# EAGLE board telemetry-r1 (EAGLE 7.6.0)
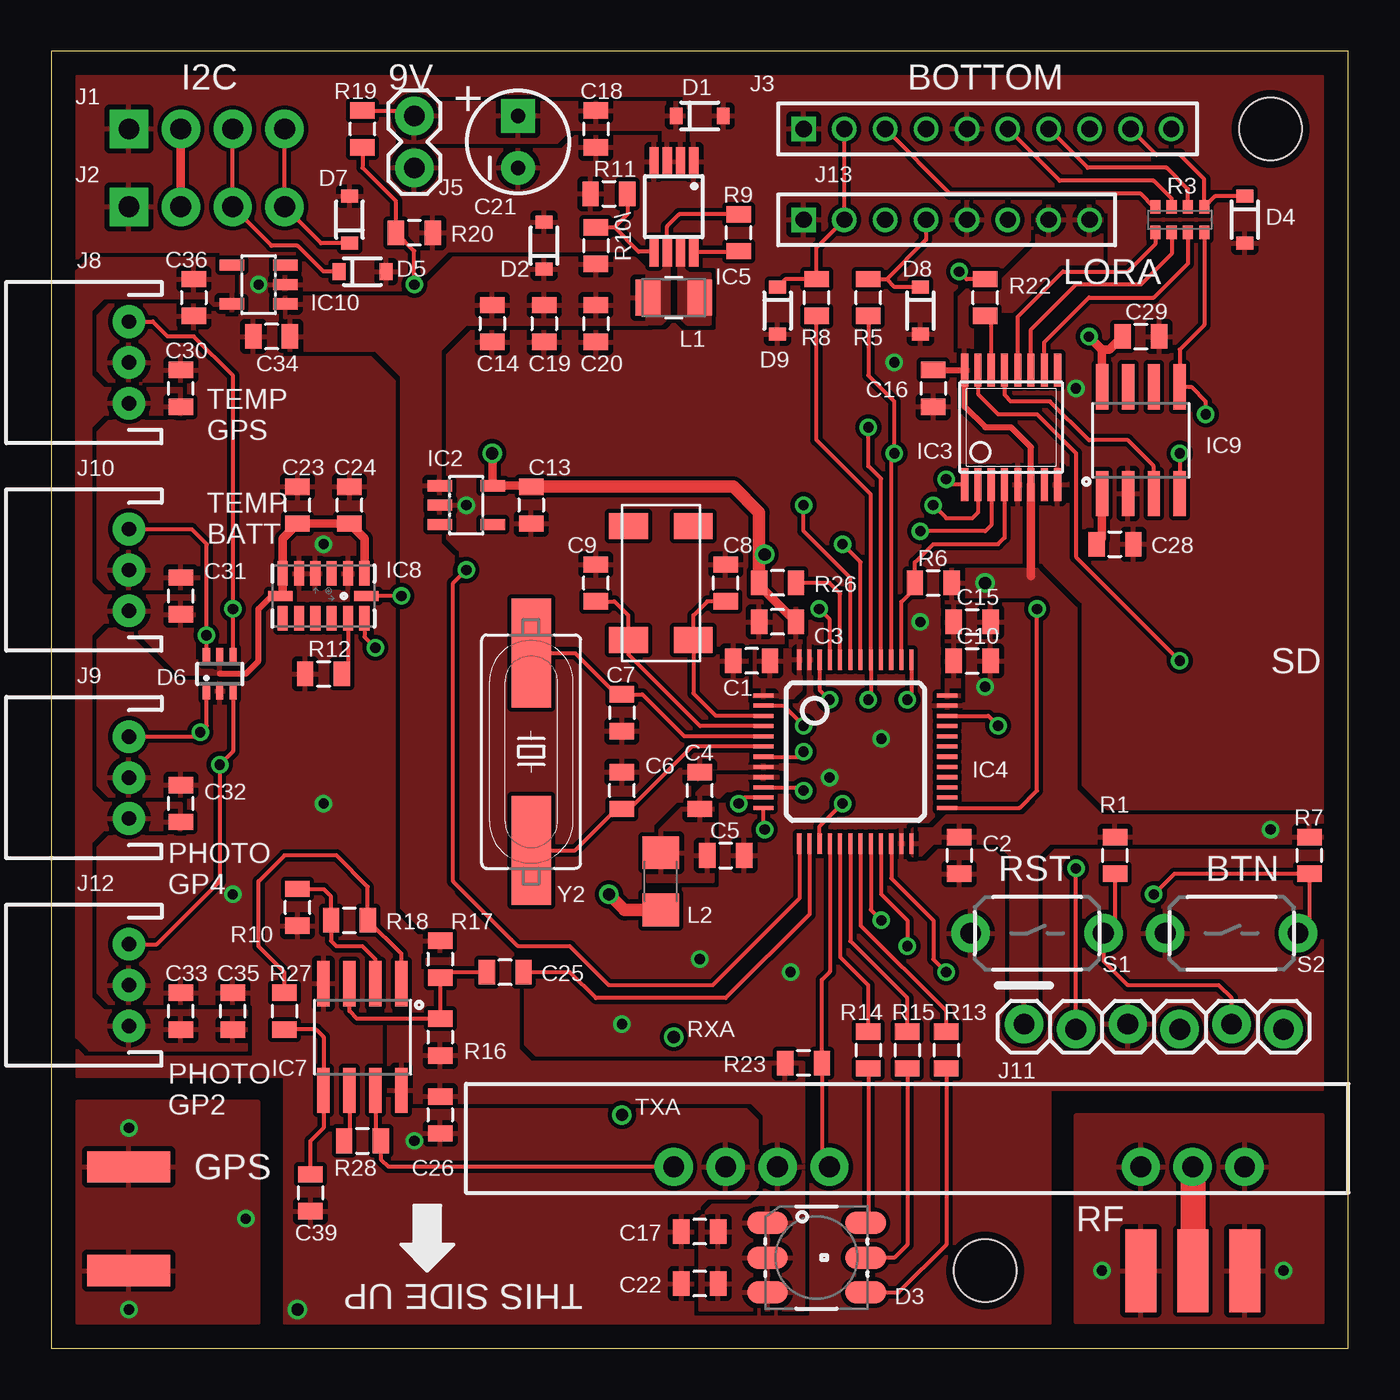
[diagram p0: board, top side]
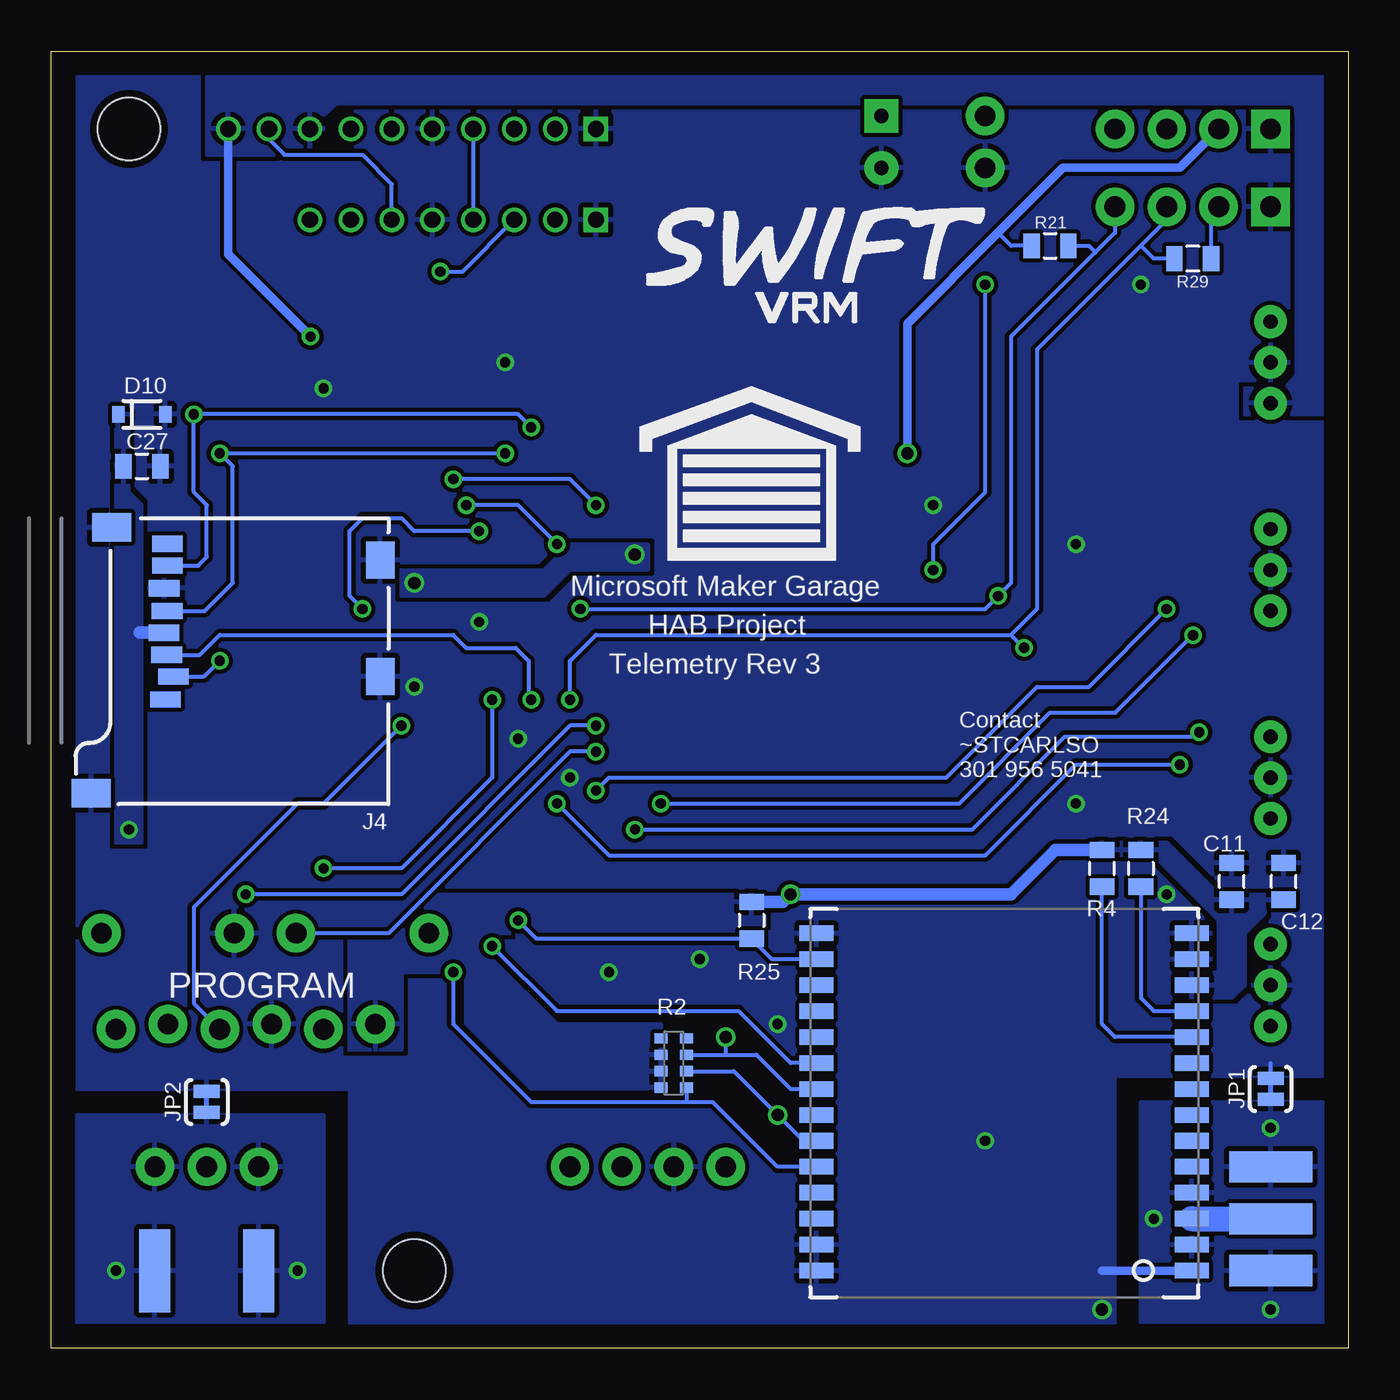
[diagram p1: board, bottom side, seen from below]

Size 63.5 x 63.5 mm. Coordinates in mm from the lower left corner, seen from the top.
Outline: 0,0 63.5,0 63.5,63.5 0,63.5 0,0
Copper layers (1*16): Top 0.0356mm / dielectric 1.5011mm / Bottom 0.0356mm
Design rules "LaenPCBOrder *": minimum track width 6mil, minimum drill 13mil, track to track 8mil, track to pad 8mil, pad to pad 8mil, via to via 8mil, smd to smd 6mil, copper to edge 15mil, drill to drill 6mil, minimum pad ring 7mil, minimum via ring 7mil, stop-mask expansion 3mil, vias tented up to drill 0mil, thermal gap 10mil
Holes 3.05 mm at 45.72,3.81 59.69,59.69

## Footprints (pad centres in the part's own frame; a part is rotated, then mirrored left to right if it is on the bottom)
0805 = smd 0.8 x 1.2: 1 -0.9,0; 2 0.9,0
CPOL-RADIAL-10UF-25V = drill 0.7 pad 1.651 square: 1 1.27,0 | drill 0.7 pad 1.651: 2 -1.27,0
SOD-323 = smd 0.63 x 0.83: A 1.15,0; C -1.15,0
LED-TRICOLOR-5050 = smd 2 x 1.1: 1 -2.4,1.7; 2 -2.4,0; 3 -2.4,-1.7; 4 2.4,-1.7; 5 2.4,0; 6 2.4,1.7
SC70-6L = smd 0.35 x 0.8: 1 -0.65,-0.85; 2 0,-0.85; 3 0.65,-0.85; 4 0.65,0.85; 5 0,0.85; 6 -0.65,0.85
COPERNICUS = smd 0.762 x 1.651: 1 0,-18.364; 2 1.27,-18.364; 3 2.54,-18.364; 4 3.81,-18.364; 5 5.08,-18.364; 6 6.35,-18.364; 7 7.62,-18.364; 8 8.89,-18.364; 9 10.16,-18.364; 10 11.43,-18.364; 11 12.7,-18.364; 12 13.97,-18.364; 13 15.24,-18.364; 14 16.51,-18.364; 15 16.51,0; 16 15.24,0; 17 13.97,0; 18 12.7,0; 19 11.43,0; 20 10.16,0; 21 8.89,0; 22 7.62,0; 23 6.35,0; 24 5.08,0; 25 3.81,0; 26 2.54,0; 27 1.27,0; 28 0,0
SOT23-DBV = smd 0.55 x 1.2: 1 -0.95,-1.3; 2 0,-1.3; 3 0.95,-1.3; 4 0.95,1.3; 5 -0.95,1.3
TSSOP16 = smd 0.35 x 1.6: 1 -2.275,-2.8; 2 -1.625,-2.8; 3 -0.975,-2.8; 4 -0.325,-2.8; 5 0.325,-2.8; 6 0.975,-2.8; 7 1.625,-2.8; 8 2.275,-2.8; 9 2.275,2.8; 10 1.625,2.8; 11 0.975,2.8; 12 0.325,2.8; 13 -0.325,2.8; 14 -0.975,2.8; 15 -1.625,2.8; 16 -2.275,2.8
TQFP48 = smd 0.2 x 1: 1 -2.75,-4.5; 2 -2.25,-4.5; 3 -1.75,-4.5; 4 -1.25,-4.5; 5 -0.75,-4.5; 6 -0.25,-4.5; 7 0.25,-4.5; 8 0.75,-4.5; 9 1.25,-4.5; 10 1.75,-4.5; 11 2.25,-4.5; 12 2.75,-4.5; 25 2.75,4.5; 26 2.25,4.5; 27 1.75,4.5; 28 1.25,4.5; 29 0.75,4.5; 30 0.25,4.5; 31 -0.25,4.5; 32 -0.75,4.5; 33 -1.25,4.5; 34 -1.75,4.5; 35 -2.25,4.5; 36 -2.75,4.5 | smd 1 x 0.2: 13 4.5,-2.75; 14 4.5,-2.25; 15 4.5,-1.75; 16 4.5,-1.25; 17 4.5,-0.75; 18 4.5,-0.25; 19 4.5,0.25; 20 4.5,0.75; 21 4.5,1.25; 22 4.5,1.75; 23 4.5,2.25; 24 4.5,2.75; 37 -4.5,2.75; 38 -4.5,2.25; 39 -4.5,1.75; 40 -4.5,1.25; 41 -4.5,0.75; 42 -4.5,0.25; 43 -4.5,-0.25; 44 -4.5,-0.75; 45 -4.5,-1.25; 46 -4.5,-1.75; 47 -4.5,-2.25; 48 -4.5,-2.75
MSOP8 = smd 0.45 x 1.45: 1 -0.975,-2.2; 2 -0.325,-2.2; 3 0.325,-2.2; 4 0.975,-2.2; 5 0.975,2.2; 6 0.325,2.2; 7 -0.325,2.2; 8 -0.975,2.2
HX1 = drill 1.016 pad 1.88: 1 0,0; 2 2.54,0; 3 5.08,0; 4 20.32,0; 5 22.86,0; 6 25.4,0; 7 27.94,0
SO08 = smd 0.61 x 2.21: 1 -1.905,-2.616; 2 -0.635,-2.616; 3 0.635,-2.616; 4 1.905,-2.616; 5 1.905,2.616; 6 0.635,2.616; 7 -0.635,2.616; 8 -1.905,2.616
LGA14 = smd 0.5 x 1.2: 1 2,1.1; 2 1.2,1.1; 3 0.4,1.1; 4 -0.4,1.1; 5 -1.2,1.1; 6 -2,1.1; 8 -2,-1.1; 9 -1.2,-1.1; 10 -0.4,-1.1; 11 0.4,-1.1; 12 1.2,-1.1; 13 2,-1.1 | smd 1.2 x 0.5: 7 -2.1,0; 14 2.1,0
SOIC8 = smd 0.61 x 2.21: 1 -1.905,-2.616; 2 -0.635,-2.616; 3 0.635,-2.616; 4 1.905,-2.616; 5 1.905,2.616; 6 0.635,2.616; 7 -0.635,2.616; 8 -1.905,2.616
1X04_NO_SILK = drill 1.016 pad 1.88 square: 1 0,0 | drill 1.016 pad 1.88: 2 2.54,0; 3 5.08,0; 4 7.62,0
1X10-2MM = drill 0.8 square: 1 0,0 | drill 0.8: 2 2,0; 3 4,0; 4 6,0; 5 8,0; 6 10,0; 7 12,0; 8 14,0; 9 16,0; 10 18,0
MICROSD_1:1 = smd 0.8 x 1.5: 1 5.096,10.919; 2 6.218,10.519; 3 7.274,10.853; 4 8.367,10.982; 5 9.421,10.828; 6 10.539,10.973; 7 11.648,10.819; 8 12.721,10.819 | smd 1.8 x 1.4: CD1 11.92,0.4; CD2 6.22,0.4 | smd 1.4 x 1.9: GND1 0.497,14.55; GND3 13.52,13.55
1X02 = drill 1.016 pad 1.88: 1 0,0; 2 2.54,0
SMA-EDGE = smd 1.524 x 4.064: GND@0 0,0; GND@1 5.08,0; SIG 2.54,0 | smd 1.524 x 4.064 bottom: GND@2 0,0; GND@3 5.08,0
JST-3-PTH = drill 0.7 pad 1.6: 1 -2,0; 2 0,0; 3 2,0
1X06_LOCK = drill 1.016 pad 1.88: 1 0,0; 2 2.54,-0.254; 3 5.08,0; 4 7.62,-0.254; 5 10.16,0; 6 12.7,-0.254
1X08-2MM = drill 0.8 square: 1 0,0 | drill 0.8: 2 2,0; 3 4,0; 4 6,0; 5 8,0; 6 10,0; 7 12,0; 8 14,0
PAD-JUMPER-2-NC_BY_TRACE_YES_SILK = smd 0.635 x 1.27: 1 -0.508,0; 2 0.508,0
1008 = smd 1.753 x 1.219: 1 0,1.27; 2 0,-1.27
1206 = smd 1.6 x 1.8: 1 -1.4,0; 2 1.4,0
0603-ARV = smd 0.5 x 0.65: 1 -1.2,-0.625; 2 -0.4,-0.625; 3 0.4,-0.625; 4 1.2,-0.625; 5 1.2,0.625; 6 0.4,0.625; 7 -0.4,0.625; 8 -1.2,0.625
TACTILE-PTH-THIN = drill 1.016 pad 1.88: 1 -3.251,0; 2 3.251,0
ABS25 = smd 1.27 x 1.905: 1 -2.794,-1.587; 2 2.794,-1.587; 3 2.794,1.587; 4 -2.794,1.587
HC49UP = smd 5.334 x 1.93: 1 -4.826,0; 2 4.826,0

## Placement (x,y rotation side)
C1  0.1u  [0805]  34.29,33.66 180 top
C2  0.1u  [0805]  44.45,24.13 270 top
C3  0.1u  [0805]  35.56,35.56 180 top
C4  0.1u  [0805]  31.75,27.3 90 top
C5  1u  [0805]  33.02,24.13 0 top
C6  33p  [0805]  27.94,27.3 90 top
C7  33p  [0805]  27.94,31.11 270 top
C8  10p  [0805]  33.02,37.47 90 top
C9  10p  [0805]  26.67,37.47 90 top
C10  0.1u  [0805]  45.09,33.66 0 top
C11  0.1u  [0805]  5.71,22.86 90 bottom
C12  1u  [0805]  3.17,22.86 90 bottom
C13  1u  [0805]  23.5,41.27 270 top
C14  0.1u  [0805]  21.59,50.16 270 top
C15  1u  [0805]  45.09,35.56 0 top
C16  0.1u  [0805]  43.18,46.99 270 top
C17  0.1u  [0805]  31.75,5.71 180 top
C18  1u  [0805]  26.67,59.69 270 top
C19  10u  [0805]  24.13,50.16 270 top
C20  10u  [0805]  26.67,50.16 270 top
C21  100u  [CPOL-RADIAL-10UF-25V]  22.86,59.05 90 top
C22  1u  [0805]  31.75,3.17 180 top
C23  0.1u  [0805]  12.06,41.27 90 top
C24  1.0u  [0805]  14.61,41.27 90 top
C25  330p  [0805]  22.23,18.41 180 top
C26  0.1u  [0805]  19.05,11.43 270 top
C27  0.1u  [0805]  59.05,43.18 0 bottom
C28  0.1u  [0805]  52.07,39.37 0 top
C29  0.1u  [0805]  53.34,49.53 0 top
C30  0.1u  [0805]  6.35,46.99 90 top
C31  0.1u  [0805]  6.35,36.83 90 top
C32  0.1u  [0805]  6.35,26.67 90 top
C33  0.1u  [0805]  6.35,16.51 90 top
C34  0.1u  [0805]  10.79,49.53 180 top
C35  1u  [0805]  8.89,16.51 90 top
C36  1u  [0805]  6.99,51.44 270 top
C39  100p  [0805]  12.7,7.62 270 top
D1  12V  [SOD-323]  31.75,60.33 0 top
D2  5.6V  [SOD-323]  24.13,53.98 90 top
D3  COM-10866  [LED-TRICOLOR-5050]  37.47,4.45 0 top
D4  5.6V  [SOD-323]  58.42,55.24 270 top
D5  5.6V  [SOD-323]  15.24,52.7 0 top
D6  CM1213A  [SC70-6L]  8.26,33.02 0 top
D7  5.6V  [SOD-323]  14.61,55.24 90 top
D8  5.6V  [SOD-323]  42.55,50.8 270 top
D9  5.6V  [SOD-323]  35.56,50.8 270 top
D10  5.6V  [SOD-323]  59.05,45.72 0 bottom
FRAME1  FRAME-LETTERNO_PACKAGE  [DUMMY]  0,64.77 0 top
FRAME2  FRAME-LETTERNO_PACKAGE  [DUMMY]  1.27,64.77 0 top
IC1  COPERNICUSSMD  [COPERNICUS]  26.04,3.81 90 bottom
IC2  TPS70933  [SOT23-DBV]  20.32,41.27 270 top
IC3  74HC137  [TSSOP16]  46.99,45.09 0 top
IC4  STM32L073CZT6  [TQFP48]  39.37,29.21 270 top
IC5  TPS62160  [MSOP8]  30.48,55.88 180 top
IC6  HX1  [HX1]  58.42,8.89 180 top
IC7  LMP7702  [SO08]  15.24,15.24 180 top
IC8  ADXL345  [LGA14]  13.34,36.83 0 top
IC9  HIH9131  [SOIC8]  53.34,44.45 0 top
IC10  TPS70933  [SOT23-DBV]  10.16,52.07 90 top
J1  I2C1  [1X04_NO_SILK]  3.81,59.69 0 top
J2  I2C2  [1X04_NO_SILK]  3.81,55.88 0 top
J3  BOTTOM  [1X10-2MM]  36.83,59.69 0 top
J4  USD-SOCKET  [MICROSD_1:1]  46.99,26.67 90 bottom
J5  BAT  [1X02]  17.78,57.78 90 top
J6  SMA_EDGE  [SMA-EDGE]  53.34,3.81 0 top
J7  SMA_EDGE  [SMA-EDGE]  3.81,3.81 90 bottom
J8  TEMP_GPS  [JST-3-PTH]  3.81,48.26 90 top
J9  PHOTO_GP4  [JST-3-PTH]  3.81,27.94 90 top
J10  TEMP_BAT  [JST-3-PTH]  3.81,38.1 90 top
J11  DNP  [1X06_LOCK]  47.62,15.88 0 top
J12  PHOTO_GP2  [JST-3-PTH]  3.81,17.78 90 top
J13  LORA  [1X08-2MM]  36.83,55.24 0 top
JP1  GND  [PAD-JUMPER-2-NC_BY_TRACE_YES_SILK]  3.81,12.7 90 bottom
JP2  GND  [PAD-JUMPER-2-NC_BY_TRACE_YES_SILK]  55.88,12.06 90 bottom
L1  2.2u  [1008]  30.48,51.44 270 top
L2  FERRITE  [1206]  29.84,22.86 90 top
R1  10K  [0805]  52.07,24.13 90 top
R2  10K  [0603-ARV]  33.02,13.97 270 bottom
R3  100  [0603-ARV]  55.24,55.24 180 top
R4  10K  [0805]  12.06,23.5 90 bottom
R5  100  [0805]  40.01,51.44 90 top
R6  10K  [0805]  43.18,37.47 0 top
R7  10K  [0805]  61.59,24.13 90 top
R8  100  [0805]  37.47,51.44 90 top
R9  10K  [0805]  33.66,54.61 90 top
R10  470K  [0805]  12.06,21.59 90 top
R10\  430K  [0805]  26.67,53.98 270 top
R11  82K  [0805]  27.3,56.52 0 top
R12  10K  [0805]  13.34,33.02 0 top
R13  220  [0805]  43.81,14.61 270 top
R14  220  [0805]  40.01,14.61 270 top
R15  330  [0805]  41.91,14.61 270 top
R16  820K  [0805]  19.05,15.24 270 top
R17  220K  [0805]  19.05,19.05 270 top
R18  680K  [0805]  14.61,20.95 0 top
R19  470K  [0805]  15.24,59.69 90 top
R20  180K  [0805]  17.78,54.61 180 top
R21  4.7K  [0805]  14.61,53.98 0 bottom
R22  100  [0805]  45.72,51.44 90 top
R23  4.7K  [0805]  36.83,13.97 180 top
R24  10K  [0805]  10.16,23.5 270 bottom
R25  10K  [0805]  29.21,20.95 270 bottom
R26  10K  [0805]  35.56,37.47 180 top
R27  330k  [0805]  11.43,16.51 270 top
R28  10K  [0805]  15.24,10.16 0 top
R29  4.7K  [0805]  7.62,53.34 180 bottom
S1  RST  [TACTILE-PTH-THIN]  48.26,20.32 0 top
S2  BTN  [TACTILE-PTH-THIN]  57.78,20.32 0 top
U$2  [GARAGE]  29.21,41.91 0 bottom
U$5  [SWIFT]  27.3,52.7 0 bottom
Y1  32768  [ABS25]  29.84,37.47 90 top
Y2  8M  [HC49UP]  23.5,29.21 270 top

## Library data of the parts
C1-C36 C39 JP1 JP2 R1-R10 R10\ R11-R29 = SparkFun-Passives
D1 D2 D4 D5 D7-D10 = SparkFun-DiscreteSemi; PROD_ID: DIO-12442
D3 = SparkFun-LED
D6 IC3 IC5 IC6 J13 L1 L2 S1 S2 U$2 U$5 Y1 = HAB
FRAME1 FRAME2 = SparkFun-Aesthetics; DESIGNER: Nobody; VERSION: v01
IC1 = SparkFun-RF
IC2 IC10 = texas; MF: TEXAS INSTRUMENTS; MPN: TPS77033DBVT; OC_FARNELL: 8461570; OC_NEWARK: 77C1187
IC4 = stm32xx
IC7 IC9 = SparkFun-AnalogIC
IC8 = SparkFun-Sensors
J1-J3 J5-J7 J11 = SparkFun-Connectors
J4 = SparkFun-Connectors; PROD_ID: CONN-07820
J8-J10 J12 = SparkFun-Connectors; SKU: PRT-09915
Y2 = SparkFun-FreqCtrl

## Nets
3.3V: C1.1 C2.1 C3.1 C10.1 C11.1 C12.1 C13.1 C15.1 C16.1 C27.1 D10.C IC1.12 IC2.5 IC3.6 IC3.16 IC4.1 IC4.24 IC4.36 IC4.48 J1.2 J2.2 J4.4 J11.1 J13.7 J13.8 L2.1 R1.2 R2.2 R2.3 R2.4 R4.2 R6.2 R7.2 R21.1 R24.1 R25.1 R26.2 R29.1
5V: C14.1 C17.1 C19.1 C20.1 C22.1 C26.1 C34.1 D2.C D3.1 D3.2 D3.3 IC2.1 IC5.6 IC6.5 IC7.8 IC10.1 L1.2 R9.2 R10\.2 R16.2 R23.2
!RST!: IC4.7 J11.5 R1.1 S1.2
+9V: C18.1 C21.1 D1.C IC5.2 IC5.3 J5.2 R19.2
A+: C25.2 IC7.3 R16.1 R17.2
A-: IC7.2 R10.2 R18.1
ADXL_SDO: IC8.12 R12.2
AGND: IC1.2 IC1.4 J7.GND@0 J7.GND@1 J7.GND@2 J7.GND@3 JP1.1
AL_L: IC9.6
B_CSADC: J3.7 R3.2
B_CSHUM: J3.3 R3.4
B_CSPRS: J3.6 R3.3
B_LORA: J13.3 R22.2
B_MISO: D4.C J3.9 J13.6 R3.1
B_MOSI: D9.C J3.2 J13.2 R8.2
B_SCK: D8.C J3.4 J13.4 R5.2
BC: D3.4 R13.2
BOOT0: IC4.44 R26.1
BTN: IC4.2 R7.1 S2.2
CSA0: IC3.1 IC4.43
CSA1: IC3.2 IC4.42
CSA2: IC3.3 IC4.25
CSADC: IC3.10 R3.7
CSBHUM: IC3.12 R3.5
CSHUM: IC3.13 IC9.3
CSLAT: IC3.4 IC4.38 R6.1
CSLORA: IC3.14 R22.1
CSPRS: IC3.11 R3.6
CSSD: IC3.15 J4.2
D+: IC4.33
D-: IC4.32
DAC: C25.1 IC4.14
FB5: IC5.5 R10\.1 R11.2
GC: D3.6 R14.2
GND: C1.2 C2.2 C3.2 C4.2 C5.2 C6.2 C7.2 C8.2 C9.2 C10.2 C11.2 C12.2 C13.2 C14.2 C15.2 C16.2 C17.2 C18.2 C19.2 C20.2 C21.2 C22.2 C23.2 C24.2 C26.2 C27.2 C28.2 C29.2 C30.2 C31.2 C32.2 C33.2 C34.2 C35.2 C36.2 C39.2 D1.A D2.A D4.A D5.A D6.2 D7.A D8.A D9.A D10.A IC1.1 IC1.13 IC1.14 IC1.15 IC1.27 IC1.28 IC2.2 IC3.5 IC3.8 IC4.8 IC4.23 IC4.35 IC4.47 IC5.1 IC5.4 IC6.6 IC7.4 IC8.2 IC8.4 IC8.5 IC9.2 IC10.2 J1.1 J2.1 J3.1 J3.5 J4.6 J4.CD1 J4.CD2 J4.GND1 J4.GND3 J5.1 J8.2 J9.2 J10.2 J11.3 J12.2 J13.1 J13.5 JP1.2 JP2.2 R10.1 R11.1 R12.1 R17.1 R20.1 S1.1 S2.1
GPSBOOT: IC1.10 R4.1
GPSRX: IC1.24 IC4.22 R2.5
GPSTX: IC1.20 IC4.21
HXEN: IC4.16 IC6.4 R23.1
INT: IC8.8
INT2: IC8.9
LEDB: IC4.19 R13.1
LEDG: IC4.17 R14.1
LEDR: IC4.18 R15.1
LP1: IC7.1 R18.2 R27.1
LP2: C39.1 IC7.5 R27.2
LP-: IC7.6 R28.1
MCO: IC4.29
MISO: IC4.40 IC9.5 J4.7 R3.8
MOSI: IC4.41 J4.3 R8.1
OSC32_IN: C8.1 IC4.3 Y1.1
OSC32_OUT: C9.1 IC4.4 Y1.4
OSC_IN: C7.1 IC4.5 Y2.1
OSC_OUT: C6.1 IC4.6 Y2.2
PG5: IC5.8 R9.1
PHOTO_GP2: D6.3 IC4.15 J12.3
PHOTO_GP4: D6.1 IC4.12 J9.3
PPS: IC1.19
RC: D3.5 R15.2
RF_GPS: IC1.3 J7.SIG
RF_HX1: IC6.2 J6.SIG
RGND: IC6.1 IC6.3 J6.GND@0 J6.GND@1 J6.GND@2 J6.GND@3 JP2.1
RXA: IC1.21 R2.7
SCK: IC4.39 IC9.4 J4.5 R5.1
SCL: D7.C IC4.45 IC8.14 J1.4 J2.4 R21.2
SDA: D5.C IC4.46 IC8.13 J1.3 J2.3 R29.2
SW5: IC5.7 L1.1
SWCLK: IC4.37 J11.2
SWDIO: IC4.34 J11.4
TEMPB: D6.6 IC4.11 J10.3
TEMPG: D6.4 IC4.10 J8.3
TXA: IC1.23 R2.6
TXD: IC6.7 IC7.7 R28.2
USIN: IC4.27
USOUT: IC4.28
USRES: IC4.26
VCORE: C28.1 IC9.1
VDDA: C4.1 C5.1 IC4.9 L2.2
VDIV: IC4.13 R19.1 R20.2
VS: C23.1 C24.1 C29.1 C30.1 C31.1 C32.1 C33.1 C35.1 C36.1 D6.5 IC8.1 IC8.6 IC8.7 IC9.8 IC10.5 J3.8 J3.10 J8.1 J9.1 J10.1 J12.1
XRESET: IC1.11 R24.2
XSTBY: IC1.16 IC4.20 R25.2

## Tracks (layer width: path | path; a pad name or v marks a point on that pad's centre or on a via)
3.3V  (via drill 0.5, 0.6)
  Top 0.305: C16.1 IC3.16 44.72,46.09 45.72,45.09 46.99,45.09 47.97,44.11 IC3.6
  Top 0.406: J2.2 J1.2 | R26.2 34.66,37.36 C3.1 | IC3.6 47.97,37.8 | C13.1 23.45,42.23 IC2.5 21.62,43.78 v21.59,43.81
  Top 0.61: L2.1 28.07,21.46 v27.3,22.23 | R26.2 34.66,38.86 | 34.66,38.86 34.66,40.91 33.39,42.17 C13.1 | v34.92,38.86 34.66,38.86
  Bottom 0.203: R21.1 16.51,53.98 17.14,54.61 | R29.1 6.72,55.51 J2.2
  Bottom 0.406: v21.59,43.81 21.59,50.16 17.14,54.61 13.97,57.78 8.26,57.78 J1.2
  Bottom 0.61: R4.2 14.34,24.39 16.51,22.23 v27.3,22.23 27.68,21.86 R25.1 | J4.4 59.17,35.04
  other vias: 59.69,25.4 45.72,37.47
  pour Top (isolate 0.203, rank 2): 34.42,34.16 34.42,31.88 36.32,31.88 36.7,32.26 36.7,36.2 36.2,36.2 36.2,34.16
  pour Bottom (rank 2): 3.17,22.23 5.08,20.32 5.08,17.78 5.71,17.14 8.26,17.14 8.26,18.41 6.35,18.41 6.35,20.95 9.53,24.13 12.7,24.13 12.7,24.77 8.89,24.77 6.35,22.23
  pour Top (isolate 0.203, rank 2): 42.16,25.4 42.16,24.13 42.55,24.13 43.18,24.77 46.35,24.77 46.99,24.13 46.99,15.88 48.26,15.88 48.26,24.13 48.9,24.77 62.23,24.77 62.23,26.04 51.44,26.04 50.16,27.3 50.16,36.2 48.26,38.1 43.81,38.1 43.81,31.75 44.45,31.75 44.45,36.83 48.26,36.83 48.26,26.67 47.62,26.04 43.81,26.04 43.18,25.4
  pour Bottom (isolate 0.203, rank 3): 60.33,24.77 59.05,24.77 59.05,41.27 59.69,41.91 59.69,45.72 60.33,45.72
  pour Top (isolate 0.203, rank 3): 48.26,55.88 48.26,53.98 46.35,52.07 45.09,52.07 44.45,51.44 44.45,47.62 45.09,47.62 45.09,50.8 47.62,50.8 49.53,52.7 50.8,52.7 51.44,53.34 51.44,55.88
  pour Bottom (isolate 0.203, rank 2): 33.66,15.88 33.66,12.7 40.01,12.7 43.18,15.88 43.18,18.41 46.35,18.41 46.35,14.61 48.9,14.61 48.9,20.32 46.99,20.32 45.09,22.23 28.57,22.23 28.57,20.32 41.91,20.32 41.91,19.05 38.73,15.88
  pour Bottom (isolate 0.203, rank 2): 34.29,39.37 34.29,38.1 38.1,38.1 39.37,36.83 46.35,36.83 46.35,38.1 39.37,38.1 38.1,39.37
5V
  Top 0.203: R9.2 30.75,55.51 30.16,54.92 IC5.6
  pour Top (isolate 0.203, rank 2, no thermals): 30.23,53.98 30.23,50.55 29.84,50.16 29.21,50.16 29.21,52.7 29.84,52.7 29.84,53.98
  pour Top (isolate 0.203, rank 2): 29.21,52.7 28.57,53.34 19.68,53.34 17.78,51.44 11.43,51.44 11.43,48.9 15.88,48.9 17.14,47.62 17.14,21.59 18.16,20.57 19.68,20.57 19.68,19.05 18.41,19.05 18.41,15.88 16.51,15.88 16.51,12.06 34.29,12.06 34.92,11.43 34.92,7.62 34.29,6.99 32.38,6.99 31.75,6.35 31.75,1.91 36.83,1.91 36.83,13.97 23.5,13.97 22.86,14.61 22.86,19.05 19.68,22.23 19.68,38.73 19.05,39.37 19.05,48.9 20.32,50.16 29.21,50.16
!RST!  (via drill 0.5)
  Top 0.203: R1.1 52.07,20.88 S1.2 51.51,18.97 52.7,17.78 57.15,17.78 57.78,17.14 J11.5 | IC4.7 36.58,28.96 v36.83,29.21
  Bottom 0.203: v36.83,29.21 38.1,29.21 46.99,20.32 S1.2
+9V
  Top 0.203: R19.2 17.52,60.59 J5.2
  pour Top (isolate 0.203, rank 3): 17.14,60.96 17.14,59.05 24.77,59.05 25.4,59.69 29.97,59.69 29.97,57.78 30.99,57.78 30.99,60.96
A+
  Top 0.203: C25.2 19.32,18.41 R17.2 R16.1 14.97,16.14 14.61,16.51 IC7.3
A-
  Top 0.203: R10.2 13.34,22.49 13.71,22.12 R18.1 13.71,19.95 13.97,19.68 15.24,19.68 15.88,19.05 IC7.2
ADXL_SDO
  Top 0.203: IC8.12 14.54,33.32 R12.2
AGND  (via drill 0.5)
  other vias: 3.81,10.79 3.81,1.91 9.53,6.35
  pour Top (isolate 0.203, rank 2): 1.27,12.06 1.27,1.27 10.16,1.27 10.16,12.06
  pour Bottom (isolate 0.203, rank 2): 1.27,12.06 1.27,1.27 10.16,1.27 10.16,12.06
B_CSADC
  Top 0.203: R3.2 55.65,56.75 54.61,57.78 50.73,57.78 J3.7
B_CSHUM
  Top 0.203: R3.4 53.98,55.87 53.34,56.52 44.01,56.52 J3.3
B_CSPRS
  Top 0.203: R3.3 54.84,56.28 53.98,57.15 49.37,57.15 J3.6
B_LORA  (via drill 0.5)
  Top 0.203: R22.2 44.82,52.34 v44.45,52.7
  Bottom 0.203: v44.45,52.7 43.37,52.7 J13.3
B_MISO
  Top 0.203: J3.9 54.1,58.42 55.24,58.42 56.45,57.22 R3.1 56.97,56.4 D4.C
  Bottom 0.203: J3.9 52.83,59.18 52.07,58.42 48.26,58.42 46.83,56.99 J13.6
B_MOSI
  Top 0.203: J3.2 J13.2 37.47,53.88 R8.2 35.95,52.34 D9.C
B_SCK
  Top 0.203: R5.2 40.91,52.34 | 40.91,52.34 42.83,54.26 J13.4 | D8.C 41.29,51.95 40.91,52.34
  Bottom 0.203: J13.4 J3.4
BC
  Top 0.203: R13.2 43.81,5.08 41.48,2.75 D3.4
BOOT0
  Top 0.203: IC4.44 38.62,36.95 38.1,37.47 R26.1
BTN  (via drill 0.5)
  Top 0.203: S2.2 61.59,20.88 R7.1 54.98,23.23 v53.98,22.23 | IC4.2 35.85,31.46 v36.83,30.48
  Bottom 0.203: v36.83,30.48 38.1,30.48 46.35,22.23 v53.98,22.23
CSA0  (via drill 0.5)
  Top 0.203: IC3.1 44.08,42.28 v43.81,42.55 | IC4.43 39.12,37.72 36.83,40.01 v36.83,41.27
  Bottom 0.203: v36.83,41.27 38.1,42.55 v43.81,42.55
CSA1  (via drill 0.5)
  Top 0.203: IC4.42 39.62,38.48 v38.73,39.37 | v43.18,41.27 43.81,40.64 45.09,40.64 45.37,40.92 IC3.2
  Bottom 0.203: v38.73,39.37 40.64,41.27 v43.18,41.27
CSA2  (via drill 0.5)
  Top 0.203: IC4.25 47.41,26.46 48.26,27.3 v48.26,36.2 | IC3.3 46.02,40.3 45.72,40.01 v42.55,40.01
  Bottom 0.203: v42.55,40.01 45.72,40.01 46.35,40.64 48.26,40.64 48.9,40.01 48.9,36.83 v48.26,36.2
CSADC
  Top 0.203: IC3.10 48.62,49.25 50.8,51.44 53.98,51.44 55.65,53.1 R3.7
CSBHUM
  Top 0.203: IC3.12 47.31,50.49 49.53,52.7 52.7,52.7 54.05,54.05 R3.5
CSHUM
  Top 0.203: IC9.3 53.98,43.18 52.7,44.45 50.8,44.45 48.9,46.35 46.99,46.35 46.66,46.68 IC3.13
CSLAT
  Top 0.203: IC4.38 41.62,36.54 42.28,37.2 R6.1 42.28,38.47 43.18,39.37 46.35,39.37 46.66,39.68 IC3.4
CSLORA
  Top 0.203: IC3.14 46.02,50.24 R22.1
CSPRS
  Top 0.203: R3.6 54.84,53.58 53.34,52.07 50.16,52.07 47.97,49.87 IC3.11
CSSD  (via drill 0.5)
  Top 0.203: IC3.15 45.37,46.71 46.35,45.72 48.26,45.72 50.16,43.81 50.16,38.73 v55.24,33.66
  Bottom 0.203: v55.24,33.66 56.01,32.89 J4.2
DAC
  Top 0.203: IC4.14 37.12,21.25 33.02,17.14 26.67,17.14 25.4,18.41 C25.1 23.23,18.31
FB5
  Top 0.203: R11.2 28.2,55.51 27.57,54.88 | R10\.1 27.57,54.88 | IC5.5 28.77,53.68 27.57,54.88
GC
  Top 0.203: D3.6 40.44,6.14 40.01,6.58 R14.2
GND  (via drill 0.5, 0.6)
  Bottom 0.203: JP1.2 3.81,13.97
  Bottom 0.406: IC1.1 12.06,3.81
  other vias: 12.06,1.91 8.89,22.23 42.55,35.56 50.16,46.99 27.94,15.88 13.34,39.37 20.32,41.27 10.16,52.07 17.78,10.16 45.72,32.38 41.27,48.26 40.64,29.84 38.1,27.94 31.75,19.05 36.2,18.41 13.34,26.67
  pour Bottom (isolate 0.203, rank 4): 1.27,13.34 1.27,62.23 62.23,62.23 62.23,12.7 48.9,12.7 48.9,1.27 11.43,1.27 11.43,13.34
  pour Top (isolate 0.203, rank 4): 1.27,62.23 1.27,13.34 11.43,13.34 11.43,1.27 48.9,1.27 48.9,12.7 62.23,12.7 62.23,62.23
GPSBOOT
  Bottom 0.203: IC1.10 11.43,15.24 12.06,15.88 R4.1
GPSRX  (via drill 0.5)
  Top 0.203: IC4.22 41.12,23.02 43.18,20.95 43.18,19.05 v43.81,18.41
  Bottom 0.203: IC1.24 27.94,8.89 31.11,12.06 32.38,12.06 | v43.81,18.41 43.81,15.88 40.01,12.06 32.38,12.06 | R2.5 32.4,12.07 32.38,12.06
GPSTX  (via drill 0.5)
  Top 0.203: IC4.21 40.62,22.25 41.91,20.95 v41.91,19.68
  Bottom 0.203: v41.91,19.68 38.73,16.51 29.84,16.51 27.3,13.97 IC1.20
HXEN
  Top 0.203: R23.1 37.73,9.26 IC6.4 | 37.62,14.08 R23.1 | IC4.16 38.12,18.43 37.73,18.05 R23.1
LEDB
  Top 0.203: IC4.19 39.62,20.7 43.81,16.51 R13.1
LEDG
  Top 0.203: R14.1 40.01,17.78 38.62,19.16 IC4.17
LEDR
  Top 0.203: R15.1 41.91,17.14 39.12,19.93 IC4.18
LP1
  Top 0.203: IC7.1 17.14,19.32 R18.2 15.51,22.59 13.97,24.13 11.43,24.13 10.16,22.86 10.16,19.68 11.43,18.41 R27.1
LP2
  Top 0.203: R27.2 12.96,15.61 13.34,15.24 IC7.5 13.34,10.79 12.7,10.16 C39.1
LP-
  Top 0.203: IC7.6 14.61,10.43 R28.1
MISO  (via drill 0.5)
  Top 0.203: R3.8 56.45,50.09 55.24,48.9 IC9.5 55.8,47.07 56.52,46.35 v56.52,45.72 | IC4.40 40.62,42.56 40.01,43.18 v40.01,45.09
  Bottom 0.203: J4.7 56.3,38.32 55.88,38.73 55.88,41.27 56.52,41.91 v56.52,45.72 40.64,45.72 v40.01,45.09
MOSI  (via drill 0.5)
  Top 0.203: v40.01,31.75 40.12,31.86 IC4.41 40.12,41.8 37.47,44.45 R8.1
  Bottom 0.203: J4.3 56.23,33.94 55.24,34.92 43.81,34.92 43.18,34.29 40.76,34.29 40.12,33.66 40.12,31.86 v40.01,31.75
OSC32_IN
  Top 0.203: C8.1 32.12,36.56 31.43,35.88 Y1.1 31.43,32.07 32.54,30.96 IC4.3
OSC32_OUT
  Top 0.203: C9.1 27.57,36.56 28.26,35.88 Y1.4 28.26,33.97 31.77,30.46 IC4.4
OSC_IN
  Top 0.203: IC4.5 31,29.96 28.95,32.02 C7.1 27.68,32.02 25.65,34.04 Y2.1
OSC_OUT
  Top 0.203: IC4.6 31.36,29.46 28.31,26.41 C6.1 27.68,26.41 25.65,24.38 Y2.2
PG5
  Top 0.203: IC5.8 33.62,53.68 R9.1
PHOTO_GP2  (via drill 0.5)
  Top 0.203: D6.3 8.9,29.23 v8.26,28.57 8.26,22.86 5.17,19.78 J12.3 | 38.12,26.05 v38.73,26.67 37.62,25.55 IC4.15
  Bottom 0.203: v38.73,26.67 36.2,24.13 17.78,24.13 13.34,28.57 v8.26,28.57
PHOTO_GP4  (via drill 0.5)
  Top 0.203: D6.1 7.62,32.16 7.62,30.48 v7.3,30.16 7.08,29.94 J9.3 | v34.92,25.4 34.87,25.45 IC4.12
  Bottom 0.203: v34.92,25.4 18.41,25.4 13.88,29.94 7.53,29.94 v7.3,30.16
RC
  Top 0.203: R15.2 41.91,5.08 41.27,4.45 D3.5
RF_GPS
  Bottom 1.232: IC1.3 J7.SIG
RF_HX1
  Top 1.232: IC6.2 J6.SIG
RGND  (via drill 0.5)
  other vias: 51.44,3.81 60.33,3.81
  pour Top (isolate 0.203, rank 2): 62.23,1.27 50.16,1.27 50.16,11.43 62.23,11.43
  pour Bottom (isolate 0.203, rank 2): 50.16,11.43 50.16,1.27 62.23,1.27 62.23,11.43
RXA  (via drill 0.6)
  Bottom 0.203: R2.7 30.48,14.37 | 30.48,14.37 28.98,14.37 27.3,12.7 IC1.21 | v30.48,15.24 30.48,14.37
SCK  (via drill 0.5)
  Top 0.203: v55.24,43.81 IC9.4 | IC4.39 41.12,43.66 v41.27,43.81 41.27,46.35 40.01,47.62 R5.1
  Bottom 0.203: J4.5 55.98,36.09 54.61,37.47 54.61,43.18 v55.24,43.81 v41.27,43.81
SCL  (via drill 0.5)
  Top 0.203: J1.4 J2.4 13.21,54.09 D7.C | IC4.45 38.12,35.67 v37.59,36.2 | v17.14,36.83 IC8.14
  Bottom 0.203: v37.59,36.2 17.78,36.2 v17.14,36.83 16.51,37.47 16.51,49.53 12.38,53.66 | J2.4 11.43,54.61 12.38,53.66 | R21.2 12.7,53.98 12.38,53.66
SDA  (via drill 0.5)
  Top 0.203: J1.3 J2.3 10.79,53.98 12.06,53.98 13.34,52.7 D5.C | IC4.46 37.62,32.23 v38.1,31.75 | IC8.13 15.34,34.83 v15.88,34.29
  Bottom 0.203: v38.1,31.75 38.1,33.66 36.83,34.92 16.51,34.92 | 16.51,34.92 v15.88,34.29 | J2.3 8.89,55.24 10.16,53.98 | 10.16,53.98 15.24,48.9 15.24,36.2 16.51,34.92 | R29.2 9.53,53.34 10.16,53.98
SW5
  pour Top (isolate 0.203, rank 3, no thermals): 30.73,53.98 30.73,50.55 31.11,50.16 32.26,50.16 32.26,52.58 31.11,52.58 31.11,53.98
SWCLK  (via drill 0.5)
  Top 0.203: IC4.37 42.12,31.96 v41.91,31.75 | J11.2 v50.16,23.5
  Bottom 0.203: v41.91,31.75 41.91,27.94 46.35,23.5 v50.16,23.5
SWDIO  (via drill 0.5)
  Top 0.203: IC4.34 45.88,30.96 v46.35,30.48
  Bottom 0.203: v46.35,30.48 50.16,26.67 51.44,26.67 56.52,21.59 56.52,16.89 J11.4
TEMPB  (via drill 0.5)
  Top 0.203: D6.6 v7.61,34.91 7.62,34.92 7.62,39.37 6.89,40.1 J10.3 | IC4.11 33.95,26.96 v33.66,26.67
  Bottom 0.203: v33.66,26.67 19.05,26.67 14.61,31.11 11.4,31.11 v7.61,34.91
TEMPG  (via drill 0.5)
  Top 0.203: J8.3 4.99,50.26 5.71,49.53 6.99,49.53 8.9,47.61 8.9,36.83 v8.9,36.2 D6.4 | IC4.10 36.67,27.46 v36.83,27.3
  Bottom 0.203: v36.83,27.3 36.2,27.94 19.68,27.94 15.24,32.38 12.71,32.38 v8.9,36.2
TXA  (via drill 0.6)
  Bottom 0.203: R2.6 30.08,13.57 v27.94,11.43 26.67,10.16 IC1.23
TXD
  Top 0.203: IC6.7 16.51,8.89 16.14,9.26 R28.2 15.88,10.43 IC7.7
VCORE
  Top 0.406: IC9.1 51.44,39.63 C28.1
VDDA
  pour Top (isolate 0.203, rank 2): 32.38,22.86 29.21,22.86 29.21,24.77 32.46,28.02 35.56,28.02 35.56,27.3 33.02,27.3 32.38,26.67
VDIV  (via drill 0.5)
  Top 0.203: R19.1 15.24,57.78 16.88,56.15 R20.2 17.78,53.71 v17.78,52.07 | IC4.13 36.62,22.02 32.38,17.78 27.3,17.78 25.4,19.68 22.86,19.68 19.68,22.86 19.68,37.47 v20.32,38.1
  Bottom 0.203: v20.32,38.1 20.32,39.37 17.78,41.91 v17.78,52.07
VS  (via drill 0.5)
  Top 0.305: 8.26,33.02 9.53,33.02 10.16,33.66 10.16,36.2 10.79,36.83 IC8.7
  Top 0.406: IC9.8 51.44,48.9 | 51.44,48.9 v50.8,49.53 | 51.44,48.9 51.8,48.9 C29.1 | IC8.7 11.34,36.93 IC8.6 11.34,39.65 C23.1 C24.1 15.34,39.65 IC8.1
  Bottom 0.406: v50.8,49.53 54.83,53.56 J3.10
  pour Top (rank 2): 9.53,14.61 1.91,14.61 1.27,15.24 1.27,52.7 1.91,53.34 8.89,53.34 8.89,50.8 8.26,50.8 7.62,51.44 2.54,51.44 1.91,50.8 1.91,47.62 2.54,46.99 6.35,46.99 6.35,45.72 2.54,45.72 1.91,45.09 1.91,37.47 2.54,36.83 6.99,36.83 6.99,33.66 8.26,33.66 8.26,33.02 6.35,33.02 3.81,35.56 2.54,35.56 1.91,34.92 1.91,27.3 2.54,26.67 6.35,26.67 6.35,25.4 2.54,25.4 1.91,24.77 1.91,17.14 2.54,16.51 9.53,16.51
  pour Bottom (isolate 0.203, rank 2): 5.08,46.99 5.08,45.72 1.27,45.72 1.27,62.23 55.88,62.23 55.88,58.42 50.16,58.42 50.16,60.33 49.53,60.96 3.17,60.96 2.54,60.33 2.54,47.62 3.17,46.99
XRESET
  Bottom 0.203: R24.2 10.16,17.14 9.53,16.51 IC1.11
XSTBY  (via drill 0.5)
  Top 0.203: IC4.20 40.12,21.48 v40.64,20.95
  Bottom 0.203: IC1.16 28.2,19.05 R25.2 39.74,20.05 v40.64,20.95

## Text on the board
tPlace: I2C | 9V | BOTTOM | + | LORA | TEMP / GPS | TEMP / BATT | SD | RST | BTN | PHOTO / GP4 | RXA | PHOTO / GP2 | TXA | GPS | RF | THIS SIDE UP
bPlace: Microsoft Maker Garage | HAB Project | Telemetry Rev 3 | Contact / ~STCARLSO / 301 956 5041 | PROGRAM